# Altium PCB PCB.PcbDoc
Units mm, origin at the board's own origin, x right, y up, seen from the top; angles counter-clockwise.
Board outline 152.4 x 101.6 mm, 2 copper layers (Top Layer, Bottom Layer); 67 components, 45 nets, 194 pads, 6 vias.
Unrouted connection lines stored in the file: 95.
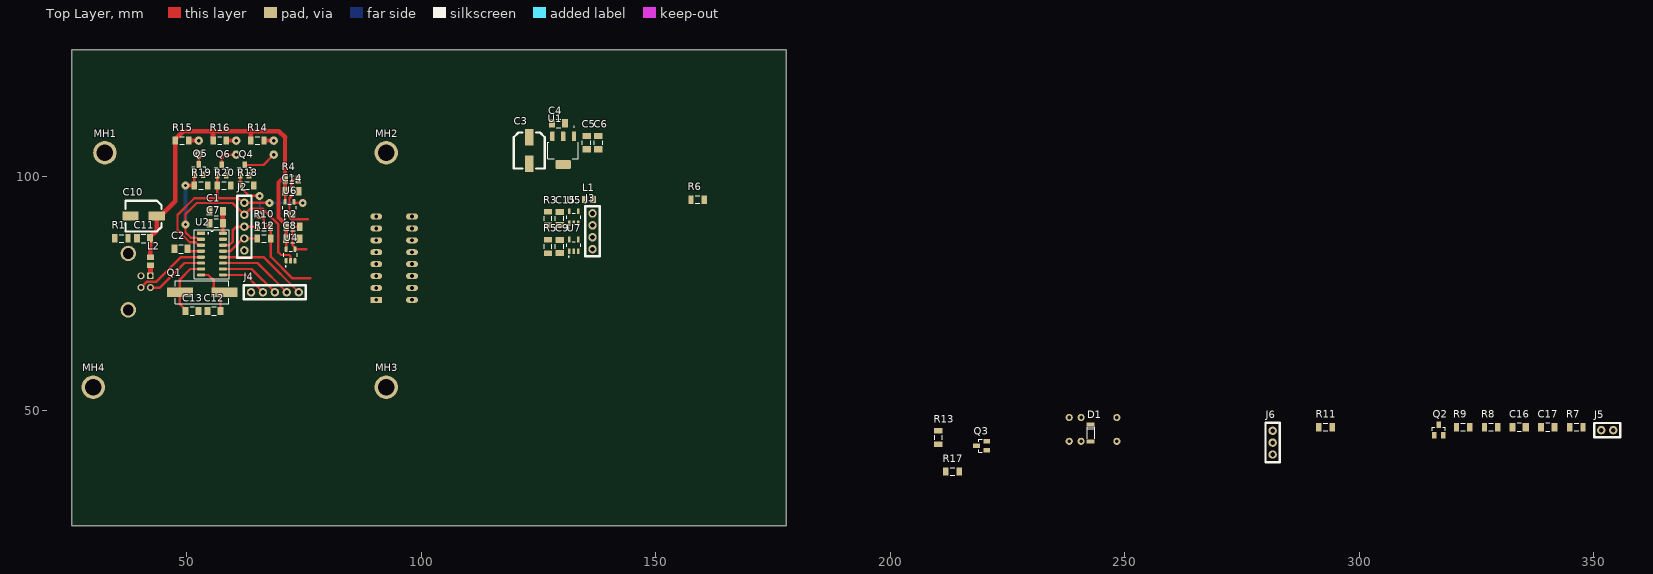
[diagram p0: Top Layer view]
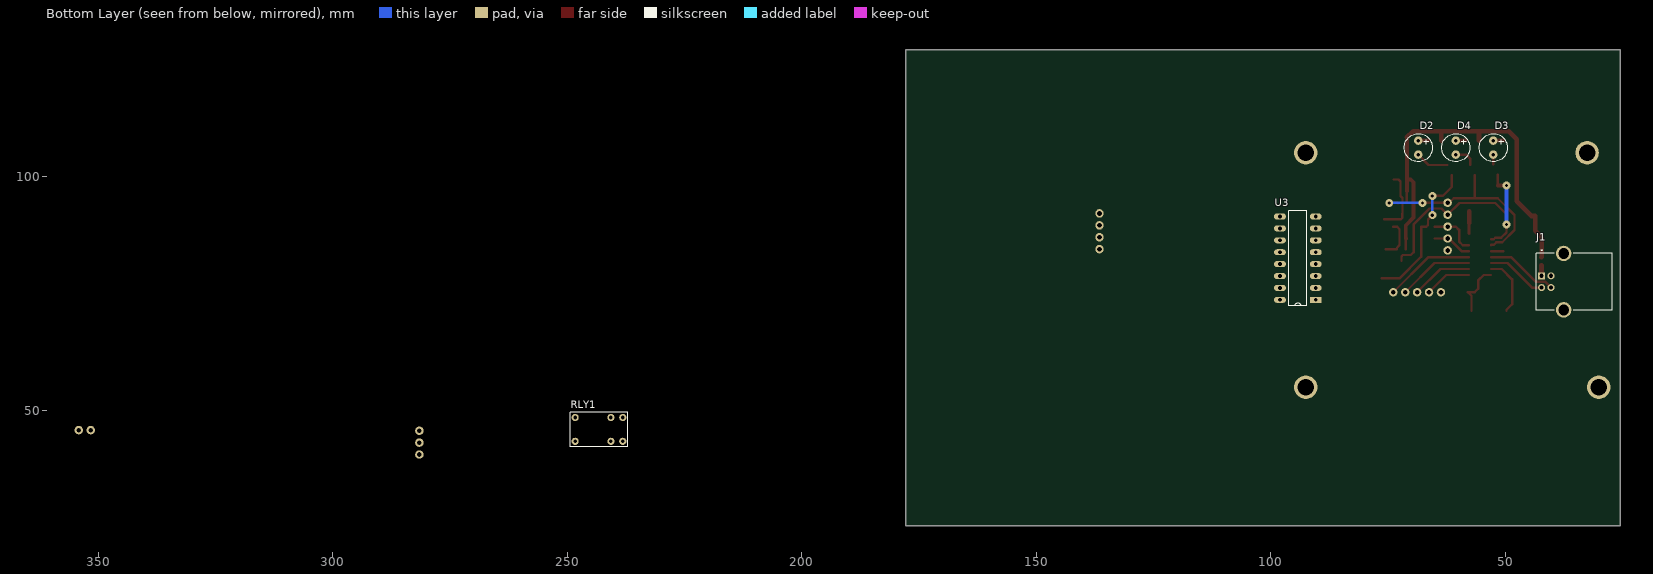
[diagram p1: Bottom Layer view, seen from below]

## Layer stack, top to bottom
Top Solder: solder mask 0.0102, Solder Resist, Dk 3.5
Top Layer: signal copper 0.0356
Dielectric 1: dielectric 0.32, FR-4, Dk 4.8
Bottom Layer: signal copper 0.0356
Bottom Solder: solder mask 0.0102, Solder Resist, Dk 3.5

## Board outline
25.4,25.4 177.8,25.4 177.8,127 25.4,127

## Design rules (kind name [scope] priority, off if disabled: settings)
Clearance [All] p1: gap=0.254 ignorepadtopadclearanceinfootprint=FALSE except(0: Arc-Hole Track-Hole SMDPad-Hole THPad-Hole Via-Hole Fill-Hole Poly-Hole Region-Hole Text-Hole)
PolygonConnect [All] p1: connectstyle=Relief reliefconductorwidth=0.254 reliefentries=4 polygonreliefangle="90 Angle" airgapwidth=0.254
RoutingVias [All] p1: holewidth=0.711 width=1.27 viastyle="Through Hole" minholewidth=0.711 minwidth=1.27 maxholewidth=0.711 maxwidth=1.27
SolderMaskExpansion [All] p1: expansion=0.102 istentingtop=FALSE
Width [All] p1: maxlimit=5 minlimit=0.25 preferedwidth=0.5 toplayer_minwidth=0.35 minimp=50.000000 maximp=50.000000 favimp=50.000000
30 further rules are at their usual default settings.

## Components (designator, comment, footprint, x,y, rotation, side; value= is the part's Value field where it differs from the comment)
C1 "1uF" FP-1206-L_3_2_0_2-W_1_6_0-IPC_B 56.25,92.5 r180 top
C2 "10p" FP-1206-L_3_2_0_2-W_1_6_0-IPC_B 48.75,84.5 r0 top
C3 "10uF" CAP_SMD_6.3x7.7mm 123,105.5 r90 top
C4 "100nF" FP-1206-L_3_2_0_2-W_1_6_0-IPC_B 129.25,111.25 r0 top
C5 "1uF" FP-1206-L_3_2_0_2-W_1_6_0-IPC_B 135.25,107.151 r90 top
C6 "100nF" FP-1206-L_3_2_0_2-W_1_6_0-IPC_B 137.75,107.151 r90 top
C7 "100nF" FP-1206-L_3_2_0_2-W_1_6_0-IPC_B 56.25,90 r180 top
C8 "100nF" FP-1206-L_3_2_0_2-W_1_6_0-IPC_B 72.55,86.7 r0 top
C9 "100nF" FP-1206-L_3_2_0_2-W_1_6_0-IPC_B 129.5,85 r270 top
C10 "10uF" CAP_SMD_6.3x7.7mm 40.75,91.5 r0 top
C11 "100nF" FP-1206-L_3_2_0_2-W_1_6_0-IPC_B 40.75,86.75 r180 top
C12 "22p" FP-1206-L_3_2_0_2-W_1_6_0-IPC_B 55.75,71.25 r0 top
C13 "22p" FP-1206-L_3_2_0_2-W_1_6_0-IPC_B 51.099,71.25 r180 top
C14 "100nF" FP-1206-L_3_2_0_2-W_1_6_0-IPC_B 72.35,96.8 r0 top
C15 "100nF" FP-1206-L_3_2_0_2-W_1_6_0-IPC_B 129.5,91 r270 top
C16 "1u" FP-1206-L_3_2_0_2-W_1_6_0-IPC_B 334.137,46.482 r0 top
C17 "100nF" FP-1206-L_3_2_0_2-W_1_6_0-IPC_B 340.233,46.482 r0 top
D1 "1N4148" SOD80C 242.75,45.25 r270 top
D2 "LED" LED_3mm 68.5,106.1 r270 bottom
D3 "LED" LED_3mm 52.5,106.1 r270 bottom
D4 "LED" LED_3mm 60.5,106.1 r270 bottom
J1 "USB-B" USB-B 37.5,77.5 r90 bottom
J2 "RS232DATA_1" PIN_HEADER_1L_5P 62.25,89.25 r270 top
J3 "SERIAL" PIN_HEADER_1L_4P 136.5,88.25 r270 top
J4 "RS232DATA_2" PIN_HEADER_1L_5P 68.75,75.25 r0 top
J5 "OPTO_OUT" PIN_HEADER_1L_2P 352.933,45.847 r0 top
J6 "RLY_OUT" PIN_HEADER_1L_3P 281.559,43.18 r90 top
L1 "470nH" INDC2012X105N 135.75,95 r0 top
L2 "470nH" INDC2012X105N 42.25,81.86 r90 top
MH1 "MH3mm" MOUNTING_HOLE_GROUNDED 32.5,105 r0 top
MH2 "MH3mm" MOUNTING_HOLE_GROUNDED 92.5,105 r0 top
MH3 "MH3mm" MOUNTING_HOLE_GROUNDED 92.5,55 r0 top
MH4 "MH3mm" MOUNTING_HOLE_GROUNDED 30,55 r0 top
Q1 "12MHz" XTAL_SMD 53.25,75.25 r180 top
Q2 "2N7002" SOT23 316.992,45.847 r0 top
Q3 "2N7002" SOT23 219.5,42.5 r90 top
Q4 "2N7002" SOT23 62.3,101.3 r0 top
Q5 "2N7002" SOT23 52.542,101.399 r0 top
Q6 "2N7002" SOT23 57.4,101.3 r0 top
R1 "0" FP-CRCW1206-e3-IPC_B 36,86.75 r0 top
R2 "Resistor" FP-CRCW1206-e3-IPC_B 72.6,89.2 r180 top
R3 "Resistor" FP-CRCW1206-e3-IPC_B 127,91 r90 top
R4 "Resistor" FP-CRCW1206-e3-IPC_B 72.35,99.3 r180 top
R5 "Resistor" FP-CRCW1206-e3-IPC_B 127,85 r270 top
R6 "Resistor" FP-CRCW1206-e3-IPC_B 158.926,95 r0 top
R7 "Resistor" FP-CRCW1206-e3-IPC_B 346.329,46.482 r0 top
R8 "Resistor" FP-CRCW1206-e3-IPC_B 328.168,46.482 r0 top
R9 "Resistor" FP-CRCW1206-e3-IPC_B 322.199,46.482 r0 top
R10 "Resistor" FP-CRCW1206-e3-IPC_B 66.4,89.2 r0 top
R11 "Resistor" FP-CRCW1206-e3-IPC_B 292.862,46.482 r0 top
R12 "Resistor" FP-CRCW1206-e3-IPC_B 66.426,86.7 r0 top
R13 "Resistor" FP-CRCW1206-e3-IPC_B 210.25,44.25 r90 top
R14 "Resistor" FP-CRCW1206-e3-IPC_B 65,107.6 r180 top
R15 "Resistor" FP-CRCW1206-e3-IPC_B 48.926,107.6 r180 top
R16 "Resistor" FP-CRCW1206-e3-IPC_B 57,107.6 r180 top
R17 "Resistor" FP-CRCW1206-e3-IPC_B 213.25,37 r180 top
R18 "Resistor" FP-CRCW1206-e3-IPC_B 62.8,98 r180 top
R19 "Resistor" FP-CRCW1206-e3-IPC_B 53,98 r180 top
R20 "Resistor" FP-CRCW1206-e3-IPC_B 57.9,98 r180 top
RLY1 "G5V-1" OMRON-G5V-1 243.25,46 r270 bottom
U1 "LD11117S50CTR" SOT230P700X180-4N 130.25,105.5 r270 top
U2 "CH340G" SOIC16 53,87.83 r0 top
U3 "LTV-847" DIP16 90.38,73.63 r0 bottom
U4 "SN74LVC1G07" SOT95P280X145-5N 72.1,83.195 r90 top
U5 "SN74LVC1G17" SOT95P280X145-5N 132.5,91.25 r90 top
U6 "SN74LVC1G17" SOT95P280X145-5N 71.873,93.269 r90 top
U7 "SN74LVC1G07" SOT95P280X145-5N 132.5,85.25 r90 top

## Footprints (in the part's own frame and the unit in brackets; to place one, negate y for a bottom-side part, rotate by r counter-clockwise, add the part's x,y. Pads: shape width x height; smd on the part's side, far side on the other; paste and mask are expansions set on the pad)
CAP_SMD_6.3x7.7mm [mm]
  rect 3.5x1.9 smd: 1(-2.8,0) 2(2.8,0)
  silkscreen extent -3.85,-3.3 3.83,3.3
DIP16 [mm]
  rect 2.54x1.27 hole 0.8: 1(0,0)
  oval 2.54x1.27 hole 0.8: 2(0,-2.54) 3(0,-5.08) 4(0,-7.62) 5(0,-10.16) 6(0,-12.7) 7(0,-15.24) 8(0,-17.78) 9(7.62,-17.78) 10(7.62,-15.24) 11(7.62,-12.7) 12(7.62,-10.16) 13(7.62,-7.62) 14(7.62,-5.08) 15(7.62,-2.54) 16(7.62,0)
  silkscreen extent 1.91,-19.05 5.71,1.27, body extent -0.25,-18.42 7.87,0.76, height 5.33
FP-1206-L_3_2_0_2-W_1_6_0-IPC_B [mm]
  rect 1.305x1.806 smd paste+0 mask+0: 1(-1.401,0) 2(1.401,0)
  silkscreen extent -0.45,-0.9 0.45,0.9, body extent -2.3,-1.15 2.3,1.15, height 0.25
FP-CRCW1206-e3-IPC_B [mm]
  rect 1.156x1.758 smd paste+0 mask+0: 1(-1.426,0) 2(1.426,0)
  silkscreen extent -0.47,-0.8 0.47,0.8, body extent -2.25,-1.13 2.25,1.13, height 0.25
INDC2012X105N [mm]
  rect 1.2x1.47 smd: 1(-0.86,0) 2(0.86,0)
  body extent -1,-0.54 1,0.51, height 1.26
LED_3mm [mm]
  round 1.8 hole 0.762: 1(-1.5,0) 2(1.5,0)
  silkscreen extent -3,-3 3,3
MOUNTING_HOLE_GROUNDED [mm]
  round 5 hole 3.5: 1(0,0)
OMRON-G5V-1 [mil]
  round 60 hole 30: 1(100,100) 2(-100,100) 3(-100,-200) 3(100,-200) 4(100,200) 5(-100,200)
  silkscreen extent -144,-242 144,243
PIN_HEADER_1L_2P [mm]
  round 1.8 hole 1: 1(-1.27,0) 2(1.27,0)
  silkscreen extent -2.79,-1.52 2.79,1.52
PIN_HEADER_1L_3P [mm]
  round 1.8 hole 1: 1(-2.54,0) 2(0,0) 3(2.54,0)
  silkscreen extent -4.2,-1.52 4.2,1.52
PIN_HEADER_1L_4P [mm]
  round 1.8 hole 1: 1(-3.81,0) 2(-1.27,0) 3(1.27,0) 4(3.81,0)
  silkscreen extent -5.33,-1.52 5.33,1.52
PIN_HEADER_1L_5P [mm]
  round 1.8 hole 1: 1(-5.08,0) 2(-2.54,0) 3(0,0) 4(2.54,0) 5(5.08,0)
  silkscreen extent -6.6,-1.52 6.6,1.52
SOD80C [mil]
  rect 32x67 smd: 1(-72.93,0) 2(72.93,0)
  silkscreen extent -50,-30 50,30, body extent -69,-30 69,30, height 60
SOIC16 [mm]
  rect 1.78x0.72 smd: 1(0,0)
  oval 1.78x0.72 smd: 2(0,-1.27) 3(0,-2.54) 4(0,-3.81) 5(0,-5.08) 6(0,-6.35) 7(0,-7.62) 8(0,-8.89) 9(4.68,-8.89) 10(4.68,-7.62) 11(4.68,-6.35) 12(4.68,-5.08) 13(4.68,-3.81) 14(4.68,-2.54) 15(4.68,-1.27) 16(4.68,0)
  silkscreen extent -1.4,-9.65 6,0.76
SOT23 [mm]
  rect 1x1.4 smd: 1(-0.95,-1.1) 2(0,1.1) 3(0.95,-1.1)
  silkscreen extent -1.42,-0.15 1.42,0.66, body extent -1.51,-1.3 1.52,1.3, height 1.3
SOT95P280X145-5N [mm]
  rrect50% 1.21x0.59 smd: 1(-1.255,0.95) 2(-1.255,0) 3(-1.255,-0.95) 4(1.255,-0.95) 5(1.255,0.95)
  silkscreen extent -2.51,-1.45 0.8,1.45, body extent -1.4,-1.45 1.4,1.45, height 1.45
SOT230P700X180-4N [mm]
  rrect25% 1.98x0.93 smd: 1(-3.015,2.3) 2(-3.015,0) 3(-3.015,-2.3)
  rrect25% 1.98x3.23 smd: 4(3.015,0)
  silkscreen extent -5.1,-3.25 1.75,3.25, body extent -3.5,-3.25 3.5,3.25, height 1.8
USB-B [mm] "USB-B-THT"
  rect 1.5x1.5 / inner round 1.408 / far side rect 1.408x1.408 hole 0.9: 1(1.25,4.7)
  round 1.5 hole 0.9: 2(-1.25,4.7) 3(-1.25,2.7) 4(1.25,2.7)
  round 3.316 hole 2.3: S1(-6.02,0) S2(6.02,0)
  silkscreen extent -6.05,-10.4 6.85,5.8, body extent -7.25,-10.53 7.25,5.97, height 10.7
XTAL_SMD [mm]
  rect 5.5x2 smd: 1(-4.75,0) 2(4.75,0)
  silkscreen extent -5.7,-2.4 5.7,2.4, body extent -6.6,-2.4 6.6,2.4, height 3.2

## Part data
C1 C2 C4 C5 C6 C7 C8 C9 C11 C12 C13 C14 C15 C16 C17: library part cap_unpol
C3 C10: library part cap_pol
D2 D3 D4: library part LED_3mm
J1: library part USB-B-THT
J2 J4: library part PIN_HEADER_1L_5P
J3: library part PIN_HEADER_1L_4P
J5: library part PIN_HEADER_1L_2P
J6: library part PIN_HEADER_1L_3P
L1 L2: library part Inductance
MH1 MH2 MH3 MH4: library part MOUNTING_HOLE_3.5mm_1, "3.5mm grounded mounting hole"
Q1: library part "Quartz Crystal"
Q2 Q3 Q4 Q5 Q6: library part BSS123
R1: library part Resistor, "EU symbol", Resistance=0
R2 R5 R6 R13 R14 R15 R16: "EU symbol", Resistance=330
R3 R4: "EU symbol", Resistance=5k1
R7 R8 R9 R10 R12: "EU symbol", Resistance=0
R11 R17 R18 R19 R20: "EU symbol", Resistance=10k
RLY1: library part RELAY_GENERIC_SPDT

## Via types
v1: diameter 1.7, hole 0.7, Top Layer to Bottom Layer, 6 vias

## Nets (pads, with @x,y where several pads share a name; then routed paths per layer and width w, separated by ;. In a path a pad name is that pad's centre, name@x,y a point inside that pad or via, vN(x,y) a via of type N, cw(c..) or ccw(c..) an arc to the next point about the centre after c; other vN are vias at no path point)
+5V: C1.1 C7.1 C8.1 C10.2 C11.1 C14.1 C16.1 C17.1 D1.2 L2.2 R2.2 R4.2 R6.2 R13.2 R14.2 R15.2 R16.2 RLY1.1 U2.16 U4.5 U6.5 | length 91.7
  Top Layer w0.5: U6.5 70.936,94.537 70.936,96.787 C14.1 ; U4.5 C8.1
  Top Layer w0.7: C7.1 57.665,89.985 57.665,87.839 57.675,87.83 U2.16
  Top Layer w0.8: 70.924,108.276 R4.2 ; C14.1 70.937,96.813 70.937,99.287 R4.2 ; C8.1 71.162,86.712 71.162,89.188 R2.2 71.174,89.501 69.5,91.175 69.5,98.7 70.1,99.3 R4.2
  Top Layer w1: L2.2 42.2,82.77 42.2,86.7 C11.1 42.303,86.902 42.303,87.153 43.55,88.4 C10.2 44.35,91.5 47.5,94.65 R15.2 47.5,107.901 49.199,109.6 55.537,109.6 ; R16.2 55.574,109.563 55.537,109.6 ; C7.1 C1.1 ; R14.2 63.574,109.526 63.5,109.6 ; 70.924,108.276 69.6,109.6 63.5,109.6 ; 55.537,109.6 63.5,109.6
+5VIS: C3.2 C4.1 C9.1 C15.1 R3.2 R5.1 U1.3 U5.5 U7.5
CTS: J4.2 U2.9 | length 10.1
  Top Layer w0.5: U2.9 62.52,78.94 J4.2
DCD: J4.5 U2.12 | length 19.3
  Top Layer w0.5: U2.12 66.33,82.75 J4.5
DSR: J4.3 U2.10 | length 13.1
  Top Layer w0.5: U2.10 63.79,80.21 J4.3
DTR: J2.4 R12.1 U2.13 | length 8.4
  Top Layer w0.5: U2.13 59.27,84.02 61.96,86.71 J2.4 64.99,86.71 R12.1
GND: C1.2 C2.1 C7.2 C8.2 C10.1 C11.2 C12.1 C13.1 C14.2 C16.2 C17.2 J1.4 J2.5 J4.1 MH1.1 MH2.1 MH3.1 MH4.1 Q2.3 Q3.3 Q4.3 Q5.3 Q6.3 R1.2 R9.1 R11.1 R17.1 R18.1 R19.1 R20.1 U2.1 U3.2 U3.9 U3.13 U4.3 U6.3
GNDIS: C3.1 C4.2 C5.2 C6.2 C9.2 C15.2 J3.4 U1.1 U3.4 U3.15 U5.3 U7.3
NetC2_2: C2.2 U2.4 | length 2.6
  Top Layer w0.508: C2.2@50.401,84 50.421,84.02 U2.4
NetC5_1: C5.1 C6.1 L1.1 U1.2
NetC12_2: C12.2 Q1.1 U2.8 | length 11.9
  Top Layer w0.508: U2.8 54.56,78.94 55.75,77.75 55.75,75.996 56.496,75.25 Q1.1@57.897,75.25 ; C12.2 57.151,74.504 Q1.1@57.897,75.25 ; Q1.1 Q1.1@57.897,75.25
NetC13_2: C13.2 Q1.2 U2.7 | length 12.7
  Top Layer w0.508: C13.2 49.698,71.501 48.5,72.699 Q1.2 48.5,78 50.71,80.21 U2.7
NetD1_1: D1.1 RLY1.2 U3.10
NetD2_1: D2.1 R14.1 | length 2.1
  Top Layer w0.9: R14.1 D2.1
NetD2_2: D2.2 Q4.2 | length 7.1
  Top Layer w0.5: Q4.2 66.3,102.4 D2.2
NetD3_1: D3.1 R15.1 | length 2.1
  Top Layer w0.9: R15.1 D3.1
NetD3_2: D3.2 Q5.2 | length 2.1
  Top Layer w0.5: D3.2 52.521,104.579 52.521,102.52 Q5.2
NetD4_1: D4.1 R16.1 | length 2.1
  Top Layer w0.9: R16.1 D4.1
NetD4_2: D4.2 Q6.2 | length 4.8
  Top Layer w0.5: Q6.2 57.4,103.7 58.3,104.6 D4.2
NetJ1_1: J1.1 L2.1 | length 2.3
  Top Layer w1: J1.1 42.225,78.775 42.225,80.975 L2.1
NetJ1_2: J1.2 U2.6 | length 13
  Top Layer w0.508: J1.2 44.25,76.25 49.48,81.48 U2.6
NetJ1_3: J1.3 U2.5 | length 15.5
  Top Layer w0.508: J1.3 41.458,77.508 43.492,77.508 48.734,82.75 U2.5
NetJ1_S1: J1.S1 J1.S2 R1.1
NetJ3_1: J3.1 L1.2
NetJ3_2: J3.2 U5.4
NetJ3_3: J3.3 U7.2
NetJ5_1: J5.1 U3.12
NetJ5_2: J5.2 U3.11
NetJ6_1: J6.1 RLY1.4
NetJ6_2: J6.2 RLY1.3
NetJ6_3: J6.3 RLY1.5
NetQ2_2: Q2.2 R7.1 R8.1
NetQ3_2: Q3.2 U3.8
NetR2_1: R2.1 U3.1 U4.4 | length 8.6
  Top Layer w0.5: R2.1@73.902,89.2 73,89.2 72.5,88.7 72.5,85.31 73.05,84.76 U4.4 75.45,84.45 75.5,84.4
NetR3_1: R3.1 U3.16 U5.2
NetR4_1: R4.1 U3.14 U6.2 | length 13.6
  Top Layer w0.5: R4.1 72.7,99.3 72.3,98.9 72.3,95.8 71.873,95.373 U6.2 71.918,91.969 71.918,91.093 72.211,90.8 75.8,90.8
NetR5_2: R5.2 U3.3 U7.4
NetR6_1: R6.1 R7.2 U3.5
NetR8_2: R8.2 R9.2 U3.6
NetR13_1: R13.1 U3.7
PTT: Q2.1 Q3.1 Q4.1 R10.2 R11.2 R12.2 R17.2 R18.2 | length 32.3
  Top Layer w0.5: Q4.1 61.362,100.188 61.362,98.012 R18.2 61.374,97.699 63.273,95.8 v1(65.5,95.8) ; v1(65.5,91.7) 66.435,90.765 66.435,89.565 66.8,89.2 R10.2 67.839,89.187 67.839,86.713 R12.2 67.852,82.848 72.5,78.2 76.3,78.2
  Bottom Layer w0.5: v1(65.5,91.7) v1(65.5,95.8)
RI: J4.4 U2.11 | length 16.2
  Top Layer w0.5: U2.11 65.06,81.48 J4.4
RTS: J2.3 R10.1 U2.14 | length 10.4
  Top Layer w0.5: U2.14 59.04,85.29 59.8,86.05 59.8,88.55 60.5,89.25 64.924,89.25 R10.1
RX: J2.1 Q6.1 R20.2 U2.3 U6.4 | length 45
  Top Layer w0.5: U2.3 52.931,85.359 52.401,85.359 51.849,85.911 50.589,85.911 48,88.5 48,91.75 51.55,95.3 56.4,95.3
  Top Layer w0.508: Q6.1 56.462,100.188 56.462,98.012 R20.2 56.474,95.374 56.4,95.3 60.93,95.3 61.9,94.33 J2.1 62.265,94.315 67.585,94.315 v1(67.6,94.3) ; U6.4@72.823,94.214 72.823,94.259 72.864,94.3 v1(74.7,94.3)
  Bottom Layer w0.508: v1(67.6,94.3) v1(74.7,94.3)
TX: J2.2 Q5.1 R19.2 U2.2 U4.2 | length 53.9
  Top Layer w0.5: U2.2 52.41,86.56 52.07,86.9 50.8,86.9 49.7,88 v1(49.7,89.7) 49.7,91.9 52.1,94.3 59.74,94.3 J2.2 63.56,93.1 66.096,93.1 69.5,89.696 69.5,83.8 70.1,83.2 71.8,83.2 72.1,82.9 U4.2
  Top Layer w0.508: R19.2 51.583,98.009 51.583,100.29 Q5.1
  Top Layer w0.8: v1(49.7,98) R19.2
  Bottom Layer w0.8: v1(49.7,89.7) v1(49.7,98)
pads on no net: U1.4 U2.15 U4.1 U5.1 U6.1 U7.1